# Altium PCB PCB1.PcbDoc (part 1 of 2)
Units mil, origin at the board's own origin, x right, y up, seen from the top; angles counter-clockwise.
Board outline 4250 x 4500 mil, 2 copper layers (Top Layer, Bottom Layer); 112 components, 121 nets, 412 pads, 86 vias.
Unrouted connection lines stored in the file: 20.
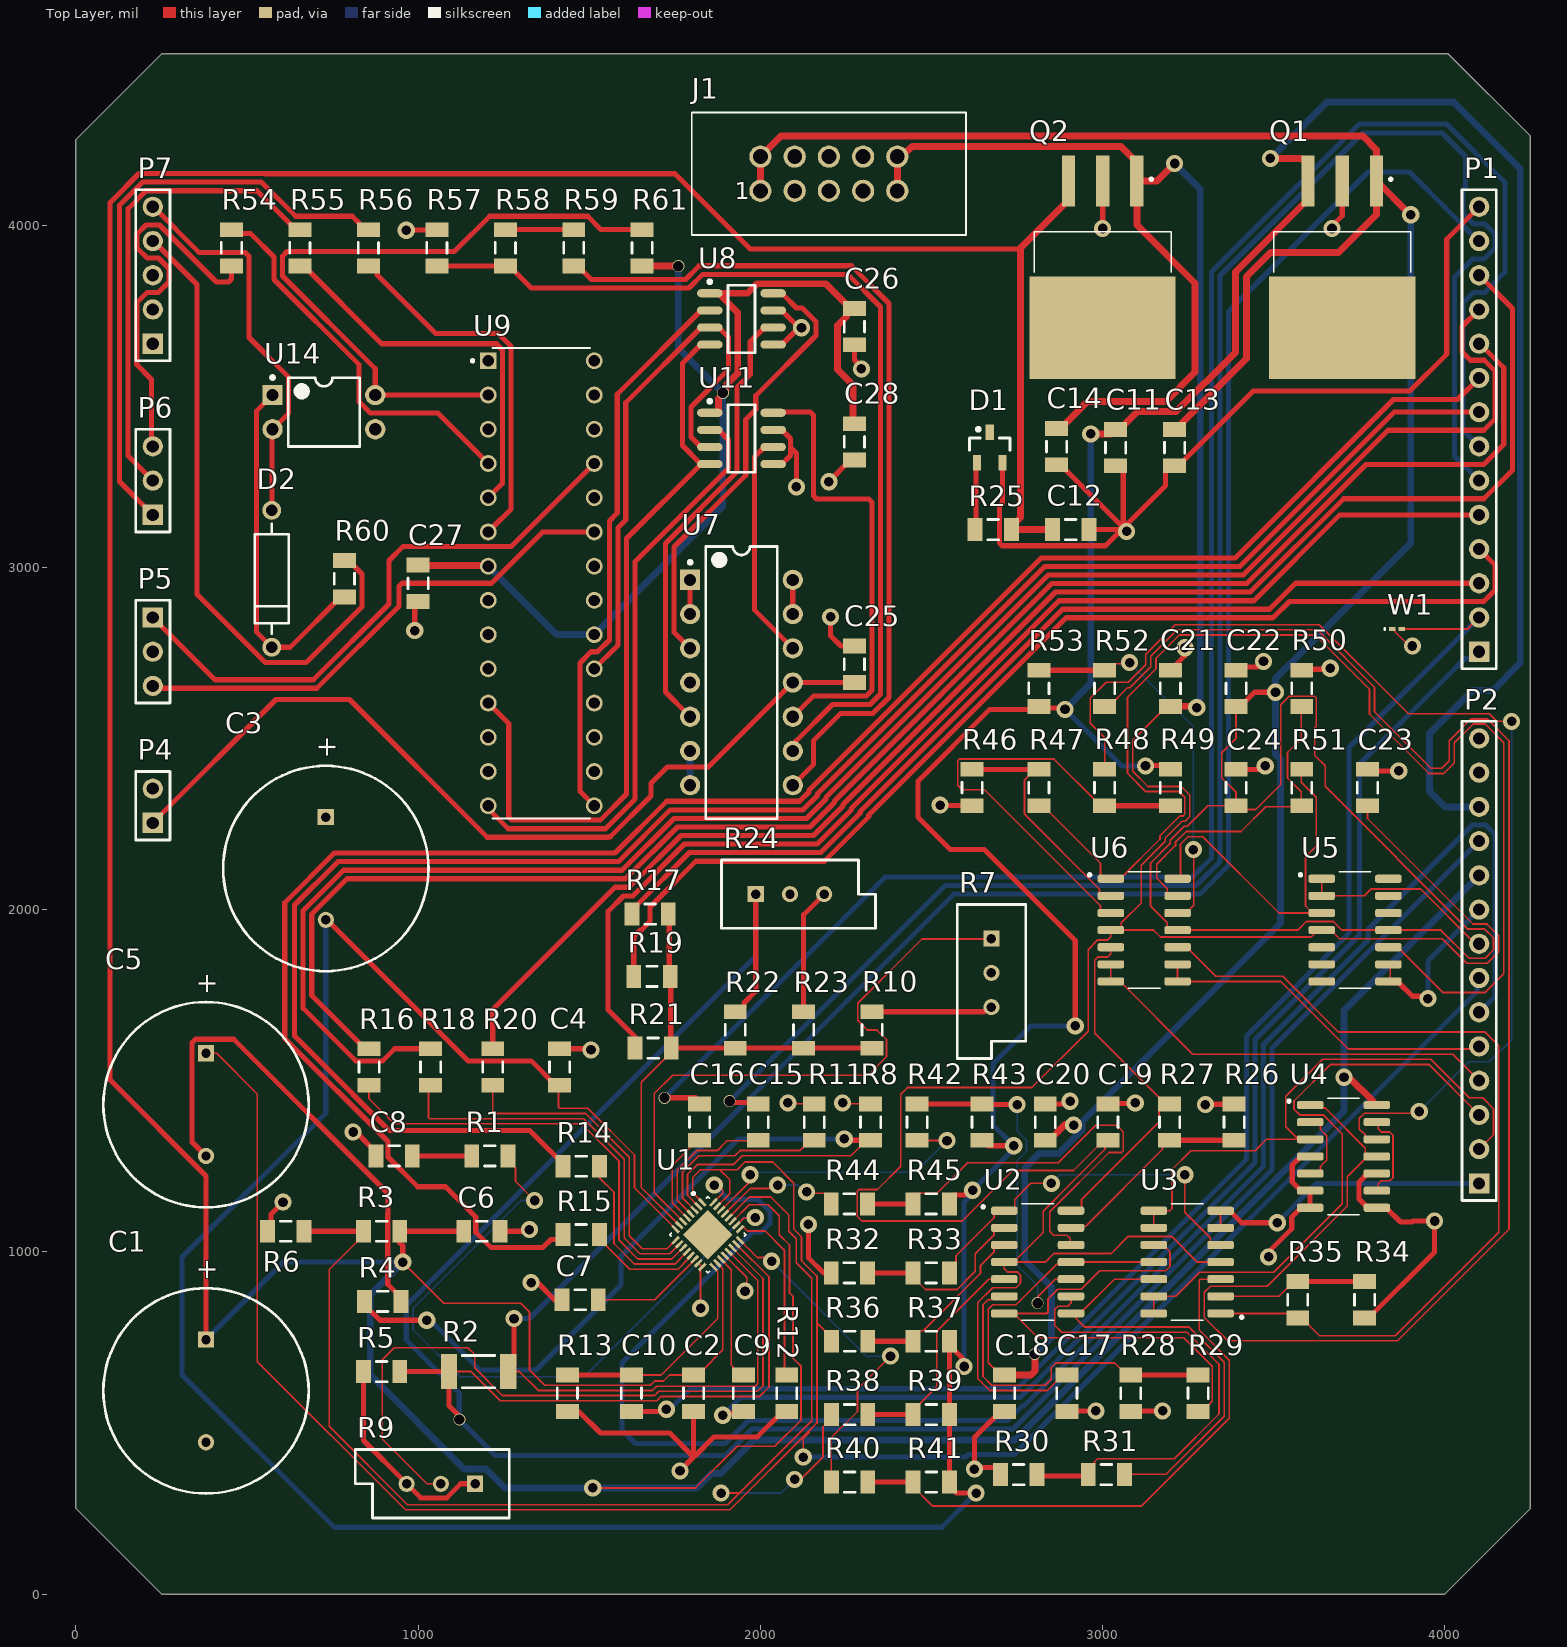
[diagram p0: Top Layer view]
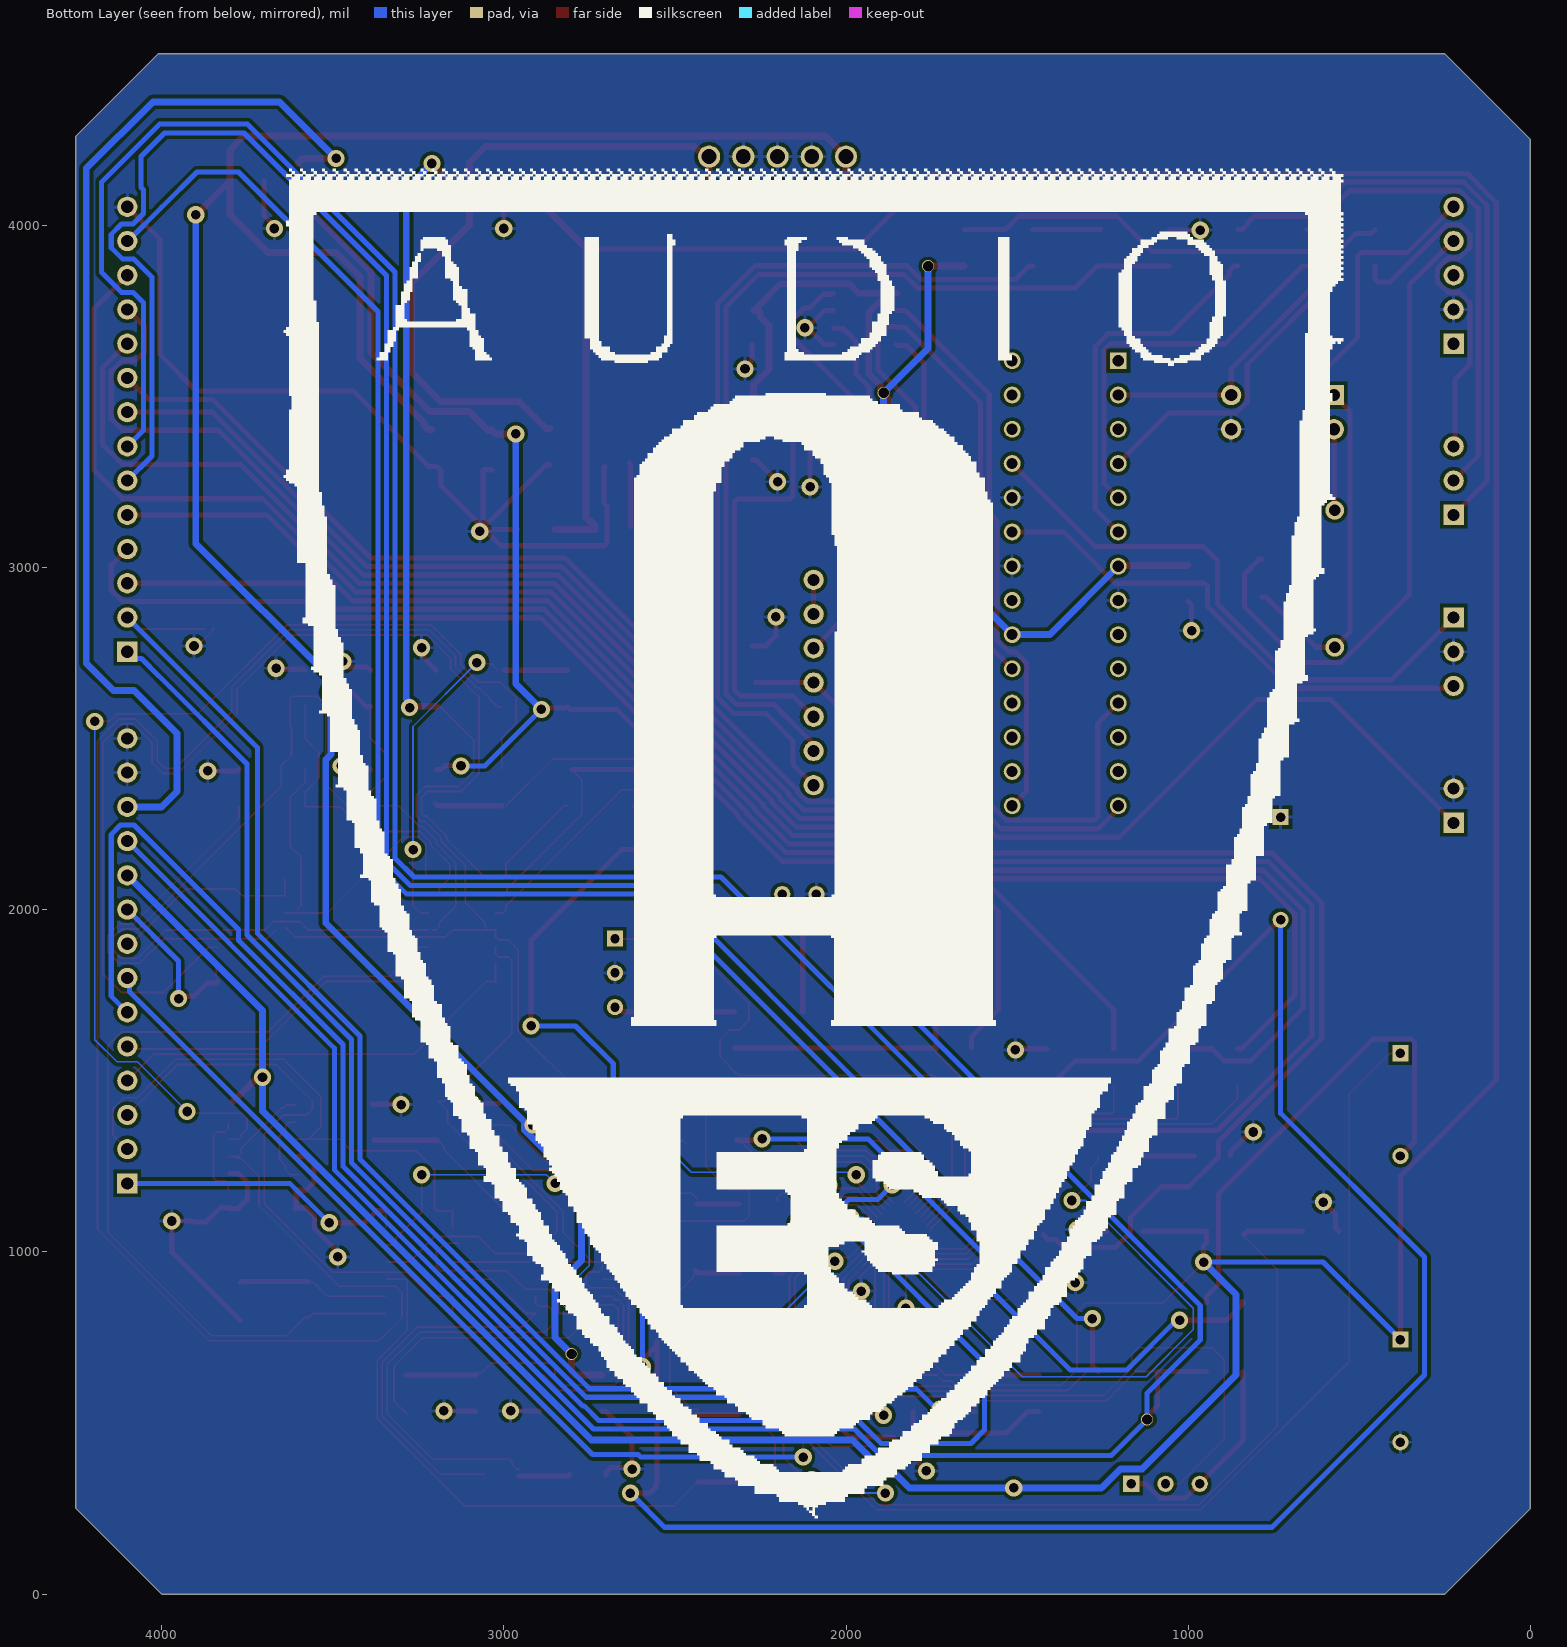
[diagram p1: Bottom Layer view, seen from below]

## Layer stack, top to bottom
Top Solder: solder mask 0.4, Solder Resist, Dk 3.5
Top Layer: signal copper 1.4
Dielectric 1: dielectric 12.6, FR-4, Dk 4.8
Bottom Layer: signal copper 1.4
Bottom Solder: solder mask 0.4, Solder Resist, Dk 3.5

## Board outline
250,0 0,250 0,4250 250,4500 4010,4500 4250,4260 4250,250 4000,0

## Design rules (kind name [scope] priority, off if disabled: settings)
Clearance Clearance_1 [All] p1: gap=10 ignorepadtopadclearanceinfootprint=FALSE except(0: Arc-Hole Track-Hole SMDPad-Hole THPad-Hole Via-Hole Fill-Hole Poly-Hole Region-Hole Text-Hole; 6: Arc-SMDPad Track-SMDPad SMDPad-SMDPad SMDPad-Fill SMDPad-Poly SMDPad-Region)
Clearance [InComponentClass('SSI2130')] p2: gap=10 ignorepadtopadclearanceinfootprint=FALSE except(0: Arc-Hole Track-Hole SMDPad-Hole THPad-Hole Via-Hole Fill-Hole Poly-Hole Region-Hole Text-Hole; 3: Arc-SMDPad Track-SMDPad SMDPad-SMDPad)
MinimumSolderMaskSliver [All] p1: minsoldermaskwidth=6
PolygonConnect [All] p1: connectstyle=Relief reliefconductorwidth=10 reliefentries=4 polygonreliefangle="90 Angle" airgapwidth=10
RoomDefinition buffNlvlshifter [InComponentClass('buffNlvlshifter')] p1: confinementstyle=ConfineIn formatcopy=TRUE lockcomponents=FALSE outline 2169.29,889.21 2169.29,1189.37 2408.12,1189.37 2408.12,1469.8 3433.53,1469.8 3433.53,950.71 3814.82,950.71 3814.82,769.29 3327.95,769.29 3327.95,496.14 3101.53,496.14 3101.53,299.36 2590,299.36 2590,277.9 2408.58,277.9 2169.75,277.9 2169.75,889.21
RoomDefinition SSI2130 [InComponentClass('SSI2130')] p2: confinementstyle=ConfineIn formatcopy=TRUE lockcomponents=FALSE outline 66.06,279.6 66.06,968.95 66.06,1805.42 416.06,1805.42 416.06,2495.42 1043.94,2495.42 1043.94,2158.94 2350.24,2158.94 2350.24,2028.94 2790.24,2028.94 2790.24,1551.06 2371.14,1551.06 2371.14,1288.38 2126.15,1288.38 2126.15,496.14 1854.13,496.14 1485.2,496.14 1280.31,496.14 1280.31,208.25 802.44,208.25 802.44,279.6
RoomDefinition Midi_to_CV [InComponentClass('Midi_to_CV')] p3: confinementstyle=ConfineIn formatcopy=TRUE lockcomponents=FALSE outline 1154.53,2163.38 2104.53,2163.38 2454.53,2683.38 2454.53,3953.38 1804.53,3953.38 1804.53,4223.38 94.53,4223.38 94.53,2163.38 324.53,2163.38 324.53,2263.38 594.53,2533.38 784.53,2533.38
RoomDefinition power [InComponentClass('power')] p4: confinementstyle=ConfineIn formatcopy=TRUE lockcomponents=FALSE outline 1779.37,3951.02 1779.37,4348.98 2620.63,4348.98 2620.63,4223.98 3934.21,4223.98 3934.21,3529.17 3259.37,3529.17 3259.37,3259.29 2997.17,3259.29 2997.17,3060.63 2815.76,3060.63 2589.29,3060.63 2589.29,3261.26 2589.13,3261.26 2589.13,3951.02
RoomDefinition flipflop [InComponentClass('flipflop')] p5: confinementstyle=ConfineIn formatcopy=TRUE lockcomponents=FALSE outline 3526.35,1087.59 3526.35,1469.8 3860.72,1469.8 3860.72,1087.59
RoomDefinition buffNlvlshifter2 [InComponentClass('buffNlvlshifter2')] p6: confinementstyle=ConfineIn formatcopy=TRUE lockcomponents=FALSE outline 2569.09,2265.88 2569.09,2447.3 2764.4,2447.3 2764.4,2736.71 3631.14,2736.71 3631.14,2447.3 3823.14,2447.3 3823.14,2131.1 3894.49,2131.1 3894.49,1748.9 2944.05,1748.9 2944.05,2265.88
RoutingVias [All] p1: holewidth=28 width=50 viastyle="Through Hole" minholewidth=28 minwidth=50 maxholewidth=28 maxwidth=50
SMDEntry [InComponentClass('SSI2130')] p1: side=TRUE corner=TRUE anyangle=TRUE
SMDNeckDown [InComponentClass('SSI2130')] p1: percent=90.000
SilkToSolderMaskClearance [IsPad] p1: minsilkscreentomaskgap=5 clearancetoexposedcopper=TRUE
SolderMaskExpansion [All] p1: expansion=4 istentingtop=FALSE
Width [All] p1: maxlimit=25 minlimit=5 preferedwidth=20 toplayer_maxwidth=20 toplayer_prefwidth=15 minimp=50.000000 maximp=50.000000 favimp=50.000000
28 further rules are at their usual default settings.

## Classes and differential pairs
component class SSI2130: C1 C2 C4 C5 C6 C7 C8 C9 C10 R1 R2 R3 R4 R5 R6 R7 R8 R9 R10 R11 R12 R13 R14 R15 R16 R17 R18 R19 R20 R21 R22 R23 R24 U1
component class power: C11 C12 C13 C14 D1 J1 Q1 Q2 R25
component class Midi_to_CV: C25 C26 C27 C28 D2 P4 P5 P6 P7 R54 R55 R56 R57 R58 R59 R60 R61 U7 U8 U9 U11 U14
component class io: C15 C16 P1 P2 W1
component class flipflop: U4
component class buffNlvlshifter: C17 C18 C19 C20 R26 R27 R28 R29 R30 R31 R32 R33 R34 R35 R36 R37 R38 R39 R40 R41 R42 R43 R44 R45 U2 U3
component class buffNlvlshifter2: C21 C22 C23 C24 R46 R47 R48 R49 R50 R51 R52 R53 U5 U6

## Components (designator, comment, footprint, x,y, rotation, side; value= is the part's Value field where it differs from the comment)
C1 "Cap Pol1" RB7.6-15 380,593.54 r90 top value=10uF
C2 "Cap" C1206 1804.76,586.85 r90 top value=100nF
C3 "Cap Pol1" RB7.6-15 730,2120 r90 top value=10uF
C4 "Cap" C1206 1413.07,1540 r270 top value=100nF
C5 "Cap Pol1" RB7.6-15 380,1430 r90 top value=10uF
C6 "Cap" C1206 1186.3,1060 r180 top value=0.1uF
C7 "Cap" C1206 1473.15,860 r0 top value=3.9nF
C8 "Cap" C1206 929.45,1280 r0 top value=10nF
C9 "Cap" C1206 1950.49,586.85 r270 top value=10nF
C10 "Cap" C1206 1622.69,586.85 r270 top value=10nF
C11 "Cap" C1206 3037.56,3350 r90 top value=0.1uF
C12 "Cap" C1206 2906.47,3110 r180 top value=0.1uF
C13 "Cap" C1206 3210,3350 r90 top value=0.22uF
C14 "Cap" C1206 2865.13,3352.91 r90 top value=0.22uF
C15 "Cap" C1206 1993.55,1379.09 r90 top value=0.1uF
C16 "Cap" C1206 1822.29,1379.09 r90 top value=0.1uF
C17 "Cap" C1206 2895.23,586.85 r90 top value=100nF
C18 "Cap" C1206 2713.24,586.85 r90 top value=100nF
C19 "Cap" C1206 3015.14,1379.09 r270 top value=100nF
C20 "Cap" C1206 2832.08,1379.09 r270 top value=100nF
C21 "Cap" C1206 3197.77,2646 r270 top value=100nF
C22 "Cap" C1206 3389.77,2646 r270 top value=100nF
C23 "Cap" C1206 3773.77,2356.59 r270 top value=100nF
C24 "Cap" C1206 3389.77,2356.59 r270 top value=100nF
C25 "C1206C103JARACTU" C1206 2274.53,2716.8 r270 top value="10,000 pF"
C26 "C1206C103JARACTU" C1206 2274.53,3703.38 r90 top value="10,000 pF"
C27 "C1206C103JARACTU" C1206 1000,2953.15 r90 top value="10,000 pF"
C28 "C1206C103JARACTU" C1206 2274.53,3366.53 r90 top value="10,000 pF"
D1 "D Zener" SOT23_N 2670,3350 r90 top
D2 "Diode" DIODE-0.4 572.13,2966.53 r270 top
J1 "61201021621" 61201021621 2200,4150 r0 top
P1 "Header 14" HDR1X14 4100,2753.38 r90 top
P2 "Header 14" HDR1X14 4100,1200 r90 top
P4 "J3" HDR1X2 224.53,2253.38 r90 top
P5 "NP_SEL" HDR1X3 224.53,2853.38 r270 top
P6 "GTC_OUTL" HDR1X3 224.53,3153.38 r90 top
P7 "MIDIJACK" HDR1X5 224.53,3653.38 r90 top
Q1 "LM7905CT/NOPB" TO254P1524X483-4N 3700,3876.38 r270 top
Q2 "LM7805CT/NOPB" TO254P1524X483-4N 3000,3876.38 r270 top
R1 "Res3" C1206 1209.45,1280 r0 top value=270
R2 "Res3" 12Z-2010 1176.3,650 r180 top value=500K
R3 "Res3" C1206 893.15,1060 r0 top value=20K
R4 "Res3" C1206 896.3,855 r0 top value=4K
R5 "Res3" C1206 893.15,650 r0 top value=4K7
R6 "Res3" C1206 613.15,1060 r0 top value=20K
R7 "RPot" VR5 2675,1815 r270 top value=5K
R8 "Res3" C1206 2321.77,1379.09 r270 top value=4K7
R9 "RPot" VR5 1066.38,322.19 r180 top value=5K
R10 "Res3" C1206 2326.3,1648.15 r90 top value=270K
R11 "Res3" C1206 2157.1,1379.09 r270 top value=4K7
R12 "Res3" C1206 2076.78,586.85 r90 top value=10K
R13 "Res3" C1206 1435.83,586.85 r90 top value=10K
R14 "Res3" C1206 1476.3,1250 r0 top value=100K
R15 "Res3" C1206 1476.3,1050 r0 top value=100K
R16 "Res3" C1206 856.3,1540 r270 top value=100K
R17 "Res3" C1206 1677.56,1986.61 r0 top value=100K
R18 "Res3" C1206 1036.3,1540 r270 top value=100K
R19 "Res3" C1206 1683.15,1805 r0 top value=100K
R20 "Res3" C1206 1217.81,1540 r270 top value=100K
R21 "Res3" C1206 1686.3,1595 r0 top value=100K
R22 "Res3" C1206 1926.3,1648.15 r90 top value=100K
R23 "Res3" C1206 2126.3,1648.15 r90 top value=10K
R24 "RPot" VR5 2086.3,2045 r0 top value=5K
R25 "Res3" C1206 2680,3110 r0 top value=1K8
R26 "Res1" C1206 3384.16,1379.09 r270 top value=2.49k
R27 "Res1" C1206 3195.28,1379.09 r90 top value=10K
R28 "Res1" C1206 3081.99,586.85 r90 top value=2.49K
R29 "Res1" C1206 3278.58,586.85 r270 top value=10K
R30 "Res1" C1206 2754.58,348.73 r0 top value=2.49K
R31 "Res1" C1206 3010.82,348.73 r0 top value=10K
R32 "Res1" C1206 2260,938.58 r0 top value=2.49K
R33 "Res1" C1206 2498.83,938.58 r0 top value=10K
R34 "Res1" C1206 3765.45,860 r90 top value=2.49K
R35 "Res1" C1206 3570,860 r270 top value=10K
R36 "Res1" C1206 2260.46,738.55 r0 top value=2.49K
R37 "Res1" C1206 2499.29,738.55 r180 top value=10K
R38 "Res1" C1206 2260.46,524.54 r0 top value=2.49K
R39 "Res1" C1206 2499.29,524.54 r180 top value=10K
R40 "Res1" C1206 2260.46,327.27 r0 top value=2.49K
R41 "Res1" C1206 2499.29,327.27 r180 top value=10K
R42 "Res1" C1206 2457.49,1379.09 r90 top value=2.49K
R43 "Res1" C1206 2647.52,1379.09 r90 top value=10K
R44 "Res1" C1206 2260,1140 r0 top value=2.49K
R45 "Res1" C1206 2498.83,1140 r180 top value=10K
R46 "Res1" C1206 2618.46,2356.59 r90 top value=2.49k
R47 "Res1" C1206 2813.77,2356.59 r270 top value=4.99K
R48 "Res1" C1206 3005.77,2356.59 r270 top value=2.49K
R49 "Res1" C1206 3197.77,2356.59 r270 top value=4.99K
R50 "Res1" C1206 3581.77,2646 r270 top value=2.49k
R51 "Res1" C1206 3581.77,2356.59 r90 top value=4.99K
R52 "Res1" C1206 3005.77,2646 r90 top value=2.49K
R53 "Res1" C1206 2813.77,2646 r90 top value=4.99K
R54 "RNCP1206FTD4K02" C1206 454.53,3933.38 r90 top
R55 "RNCP1206FTD4K02" C1206 654.53,3933.38 r270 top
R56 "RNCP1206FTD4K02" C1206 854.53,3933.38 r270 top
R57 "RNCP1206FTD4K02" C1206 1054.53,3933.38 r270 top
R58 "RNCP1206FTD4K02" C1206 1254.53,3933.38 r90 top
R59 "RNCP1206FTD4K02" C1206 1454.53,3933.38 r270 top
R60 "RNCP1206FTD4K02" C1206 784.53,2966.53 r270 top
R61 "RNCP1206FTD4K02" C1206 1654.53,3933.38 r270 top
U1 "SSI2130" QFN40P400X400X90-33N 1846.3,1050 r315 top
U2 "TL074CD" SOIC127P600X175-14N 2810,970 r0 top
U3 "TL074CD" SOIC127P600X175-14N 3246.95,970 r180 top
U4 "CD4013BM96" SOIC127P600X175-14N 3703.67,1278.69 r0 top
U5 "TL074CD" SOIC127P600X175-14N 3737.44,1940 r0 top
U6 "TL074CD" SOIC127P600X175-14N 3121.37,1940 r0 top
U7 "LM324N" DIP-14 1944.53,2663.38 r0 top
U8 "MCP4822-E/SN" SO8_L 1944.53,3725.77 r0 top
U9 "ATmega328P-PU" DIP787W46P254L3467H508Q28 1359.53,2953.38 r0 top
U11 "MCP4822-E/SN" SO8_L 1944.53,3376.53 r0 top
U14 "SFH618A-2" DIP-4 724.53,3453.38 r0 top
W1 "Jumper" 0603 3860,2820 r0 top

## Footprints (in the part's own frame and the unit in brackets; to place one, negate y for a bottom-side part, rotate by r counter-clockwise, add the part's x,y. Pads: shape width x height; smd on the part's side, far side on the other; paste and mask are expansions set on the pad)
12Z-2010 [mm] "Chip Resistor, Body 5.0x2.5mm, IPC High Density"
  rect 1.2x2.6 smd: 1(-2.2,0) 2(2.2,0)
  silkscreen extent -1.2,-1.2 1.2,1.2, body extent -2.58,-1.33 2.58,1.33, height 0.9
0603 [mm] "Chip Inductor, Body 0.6x0.3mm, IPC High Density"
  rect 0.5x0.3 smd: 1(-0.35,0) 2(0.35,0)
  silkscreen extent -0.9,-0.05 -0.9,0.05, body extent -0.33,-0.18 0.33,0.18, height 0.55
61201021621 [mm]
  round 1.65 hole 1.1: 1(-5.08,-1.27) 2(-5.08,1.27) 3(-2.54,-1.27) 4(-2.54,1.27) 5(0,-1.27) 6(0,1.27) 7(2.54,-1.27) 8(2.54,1.27) 9(5.08,-1.27) 10(5.08,1.27)
  silkscreen extent -10.18,-4.55 10.18,4.55
C1206 [mm] "Chip Capacitor, Body 3.2x1.6mm, IPC High Density"
  rect 1.1x1.7 smd: 1(-1.35,0) 2(1.35,0)
  silkscreen extent -0.4,-0.75 0.4,0.75, body extent -1.7,-0.9 1.7,0.9, height 1.3
DIODE-0.4 [mm] "Diode, Thru-Hole; 2 Leads; 0.4 in Pin Spacing"
  round 1.4 hole 0.85: 1(-5.08,0) 2(5.08,0)
  silkscreen extent -4.06,-1.27 4.06,1.27
DIP787W46P254L3467H508Q28 [mm]
  rect 1.25x1.25 hole 0.83: 1(-3.937,16.51)
  round 1.25 hole 0.83: 2(-3.937,13.97) 3(-3.937,11.43) 4(-3.937,8.89) 5(-3.937,6.35) 6(-3.937,3.81) 7(-3.937,1.27) 8(-3.937,-1.27) 9(-3.937,-3.81) 10(-3.937,-6.35) 11(-3.937,-8.89) 12(-3.937,-11.43) 13(-3.937,-13.97) 14(-3.937,-16.51) 15(3.937,-16.51) 16(3.937,-13.97) 17(3.937,-11.43) 18(3.937,-8.89) 19(3.937,-6.35) 20(3.937,-3.81) 21(3.937,-1.27) 22(3.937,1.27) 23(3.937,3.81) 24(3.937,6.35) 25(3.937,8.89) 26(3.937,11.43) 27(3.937,13.97) 28(3.937,16.51)
  silkscreen extent -5.2,-17.45 3.62,17.45, body extent -5.08,-17.34 5.08,17.34, height 4.57
DIP-4 [mm] "DIP; 4 Leads; Row Spacing 7.62 mm; Pitch 2.54 mm"
  rect 1.5x1.5 hole 0.9: 1(-3.81,1.27)
  round 1.5 hole 0.9: 2(-3.81,-1.27) 3(3.81,-1.27) 4(3.81,1.27)
  silkscreen extent -3.93,-2.55 2.65,2.69, body extent -3.15,-2.5 3.15,2.5, height 5.6
DIP-14 [mm] "DIP; 14 Leads; Row Spacing 7.62 mm; Pitch 2.54 mm"
  rect 1.5x1.5 hole 0.9: 1(-3.81,7.62)
  round 1.5 hole 0.9: 2(-3.81,5.08) 3(-3.81,2.54) 4(-3.81,0) 5(-3.81,-2.54) 6(-3.81,-5.08) 7(-3.81,-7.62) 8(3.81,-7.62) 9(3.81,-5.08) 10(3.81,-2.54) 11(3.81,0) 12(3.81,2.54) 13(3.81,5.08) 14(3.81,7.62)
  silkscreen extent -3.93,-10.1 2.65,10.1, body extent -3.6,-10.1 3.6,10.1, height 5.08
HDR1X2 [mm] "Connector; Header; 2 Position"
  rect 1.5x1.5 hole 0.9: 1(0,0)
  round 1.5 hole 0.9: 2(2.54,0)
  silkscreen extent -1.27,-1.27 3.81,1.27
HDR1X3 [mm] "Connector; Header; 3 Position"
  rect 1.5x1.5 hole 0.9: 1(0,0)
  round 1.5 hole 0.9: 2(2.54,0) 3(5.08,0)
  silkscreen extent -1.27,-1.27 6.35,1.27
HDR1X5 [mm] "Connector; Header; 5 Position"
  rect 1.5x1.5 hole 0.9: 1(0,0)
  round 1.5 hole 0.9: 2(2.54,0) 3(5.08,0) 4(7.62,0) 5(10.16,0)
  silkscreen extent -1.27,-1.27 11.43,1.27
HDR1X14 [mm] "Connector; Header; 14 Position"
  rect 1.5x1.5 hole 0.9: 1(0,0)
  round 1.5 hole 0.9: 2(2.54,0) 3(5.08,0) 4(7.62,0) 5(10.16,0) 6(12.7,0) 7(15.24,0) 8(17.78,0) 9(20.32,0) 10(22.86,0) 11(25.4,0) 12(27.94,0) 13(30.48,0) 14(33.02,0)
  silkscreen extent -1.27,-1.27 34.29,1.27
QFN40P400X400X90-33N [mm]
  rrect25% 0.73x0.22 smd: 1(-1.99,1.4) 2(-1.99,1) 3(-1.99,0.6) 4(-1.99,0.2) 5(-1.99,-0.2) 6(-1.99,-0.6) 7(-1.99,-1) 8(-1.99,-1.4) 17(1.99,-1.4) 18(1.99,-1) 19(1.99,-0.6) 20(1.99,-0.2) 21(1.99,0.2) 22(1.99,0.6) 23(1.99,1) 24(1.99,1.4)
  rrect25% 0.22x0.73 smd: 9(-1.4,-1.99) 10(-1,-1.99) 11(-0.6,-1.99) 12(-0.2,-1.99) 13(0.2,-1.99) 14(0.6,-1.99) 15(1,-1.99) 16(1.4,-1.99) 25(1.4,1.99) 26(1,1.99) 27(0.6,1.99) 28(0.2,1.99) 29(-0.2,1.99) 30(-0.6,1.99) 31(-1,1.99) 32(-1.4,1.99)
  rect 2.6x2.6 smd paste-0.48: 33(0,0)
  silkscreen extent -3.02,-2 2,2
RB7.6-15 [mm] "Polarized Capacitor (Radial); 2 Leads"
  rect 1.2x1.2 hole 0.7: 1(3.81,0)
  round 1.2 hole 0.7: 2(-3.81,0)
  silkscreen extent -7.62,-7.62 7.62,7.62
SO8_L [mm] "SOIC, 8-Leads, Body 4.9x3.9mm, Pitch 1.27mm, IPC High Density"
  oval 1.9x0.6 smd: 1(-2.35,1.905) 2(-2.35,0.635) 3(-2.35,-0.635) 4(-2.35,-1.905) 5(2.35,-1.905) 6(2.35,-0.635) 7(2.35,0.635) 8(2.35,1.905)
  silkscreen extent -2.47,-2.5 1,2.88, body extent -2,-2.5 2,2.5, height 1.75
SOIC127P600X175-14N [mm]
  rrect50% 1.97x0.6 smd: 1(-2.475,3.81) 2(-2.475,2.54) 3(-2.475,1.27) 4(-2.475,0) 5(-2.475,-1.27) 6(-2.475,-2.54) 7(-2.475,-3.81) 8(2.475,-3.81) 9(2.475,-2.54) 10(2.475,-1.27) 11(2.475,0) 12(2.475,1.27) 13(2.475,2.54) 14(2.475,3.81)
  silkscreen extent -4.15,-4.33 1.17,4.33
SOT23_N [mm] "SOT23, 3-Leads, Body 2.9x1.3mm, Pitch 0.95mm, Lead Span 2.3mm - Reverse Pinning, IPC Medium Density"
  rect 1.15x0.6 smd: 1(1.125,0) 2(-1.125,-0.95) 3(-1.125,0.95)
  silkscreen extent -0.2,-1.5 1.47,1.5, body extent -0.7,-1.5 0.7,1.5, height 1.1
TO254P1524X483-4N [mm]
  rect 3.79x0.99 smd: 1(-6.4,2.54) 2(-6.4,0) 3(-6.4,-2.54)
  rect 7.62x10.84 smd paste-6: 4(4.48,0)
  silkscreen extent -6.64,-5.08 0.36,5.08
VR5 [mm] "Thru-Hole; 3 Leads"
  rect 1.2x1.2 hole 0.7: 1(-2.54,0)
  round 1.2 hole 0.7: 2(0,0) 3(2.54,0)
  silkscreen extent -5.08,-2.54 6.35,2.54

## Part data
C1 C3 C5: "Polarized Capacitor (Radial)", LatestRevisionDate=17-Jul-2002, LatestRevisionNote="Re-released for DXP Platform.", PackageDescription="Polarized Capacitor (Radial); 2 Leads", PackageReference=RB7.6-15, Published=8-Jun-2000, Publisher="Altium Limited"
C2 C4 C6 C7 C8 C9 C10 C11 C12 C13 C14 C15 C16 C17 C18 C19 C20 C21 C22 C23 C24: "Capacitor", LatestRevisionDate=17-Jul-2002, LatestRevisionNote="Re-released for DXP Platform.", PackageDescription="Radial Cap, Thru-Hole; 2 Leads; 0.3 in Pin Spacing", PackageReference=RAD-0.3, Published=8-Jun-2000, Publisher="Altium Limited"
C25 C26 C27 C28: library part b4654b650e69147ec39a6b967a45e02, "CAP CER 10000PF 250V 5% X7R 1206", Capacitance="0.1 uF", Manufacturer=KEMET, Package=C1206C-EB, Temperature="-55°C to +150°C", Temperature Characteristic=X7R, Temperature Coefficient=15%, Temperature Range High=+150°C, Temperature Range Low=-55°C, Tolerance=0.05, Voltage Rating="250 V", Automotive=Yes, Automotive Grade="Grade 0", Category=Cap, ComponentLink2Description=Datasheet, ComponentLink2URL=https://content.kemet.com/datasheets/KEM_C1007_X8R_ULTRA_150C_SMD.pdf, Device Class L1="Passive Components", Device Class L2=Capacitors, Device Class L3="Ceramic Capacitors", Digikey Description="CAP CER 10000PF 250V 5% X7R 1206", Height=0.88mm, Ipc Land Pattern Name=CAPC320160X78, Lead Free=Yes, Manufacturer Part Number=C1206C103JARACTU, Material=Ceramic, Octopart=https://octopart.com/c1206c103jaractu-kemet-17306149, RoHS=TRUE
D1: "Zener Diode", LatestRevisionDate=17-Jul-2002, LatestRevisionNote="Re-released for DXP Platform.", PackageDescription="Diode, Thru-Hole; 2 Leads; 0.7 in Pin Spacing", PackageReference=DIODE-0.7, Published=8-Jun-2000, Publisher="Altium Limited"
D2: "Default Diode", Code_JEDEC=DO-214-AB, LatestRevisionDate=17-Jul-2002, LatestRevisionNote="Re-released for DXP Platform.", PackageDescription="DO-214-AB/SMC; 2 C-Bend Leads; Body 7.9 x 5.9 mm, inc. leads (LxW)", PackageReference=SMC, PackageVersion=Sep-1996, Published=8-Jun-2000, Publisher="Altium Limited"
J1: "Connector Header Through Hole 10 position 0.100 _2.54mm_", Package=None, Availability=Unavailable, MF="Wurth Electronics", MP=61201021621, Price=None, SnapEDA_Link=https://www.snapeda.com/parts/61201021621/Wurth%20Electronics%20Inc./view-part/1156232/?ref=snap
P1 P2: "Header, 14-Pin", LatestRevisionDate=17-Jul-2002, LatestRevisionNote="Re-released for DXP Platform.", Publisher="Altium Limited"
P4: library part "Header 2", "Header, 2-Pin", LatestRevisionDate=17-Jul-2002, LatestRevisionNote="Re-released for DXP Platform.", Publisher="Altium Limited"
P5 P6: library part "Header 3", "Header, 3-Pin", LatestRevisionDate=17-Jul-2002, LatestRevisionNote="Re-released for DXP Platform.", Publisher="Altium Limited"
P7: library part "Header 5", "Header, 5-Pin", LatestRevisionDate=17-Jul-2002, LatestRevisionNote="Re-released for DXP Platform.", Publisher="Altium Limited"
Q1: library part LM7805CT/NOPB, "1.5-A, 30-V, linear voltage regulator 3-TO-220 0 to 125", Package="TO-220-3 Texas Instruments", Availability=Unavailable, MF="Texas Instruments", MP=LM7805CT/NOPB, Price=None, SnapEDA_Link=https://www.snapeda.com/parts/LM7805CT/NOPB/Texas%20Instruments/view-part/6627/?ref=snap, Texas_Instruments-Purchase-URL=https://snapeda.com/shop?store=Texas+Instruments&id=6627
Q2: "1.5-A, 30-V, linear voltage regulator 3-TO-220 0 to 125", Package="TO-220-3 Texas Instruments", Availability=Unavailable, MF="Texas Instruments", MP=LM7805CT/NOPB, Price=None, SnapEDA_Link=https://www.snapeda.com/parts/LM7805CT/NOPB/Texas%20Instruments/view-part/6627/?ref=snap, Texas_Instruments-Purchase-URL=https://snapeda.com/shop?store=Texas+Instruments&id=6627
R1 R2 R3 R4 R5 R6 R8 R10 R11 R12 R13 R14 R15 R16 R17 R18 R19 R20 R21 R22 R23 R25 R26 R27 R28 R29 R30 R31 R32 R33 R34 R35 R36 R37 R38 R39 R40 R41 R42 R43 R44 R45 R46 R47 R48 R49 R50 R51 R52 R53: "Resistor", Published=8-Jun-2000, Publisher="Altium Limited"
  R1 R2 R3 R4 R5 R6 R8 R10 R11 R12 R13 R14 R15 R16 R17 R18 R19 R20 R21 R22 R23 R25: LatestRevisionDate=29-May-2009, LatestRevisionNote="IPC-7351 Footprint Added.", PackageDescription="Chip Resistor", PackageReference=J1-0603
  R26 R27 R28 R29 R30 R31 R32 R33 R34 R35 R36 R37 R38 R39 R40 R41 R42 R43 R44 R45 R46 R47 R48 R49 R50 R51 R52 R53: LatestRevisionDate=17-Jul-2002, LatestRevisionNote="Re-released for DXP Platform.", PackageDescription="Axial Device, Thru-Hole; 2 Leads; 0.3 in Pin Spacing", PackageReference=AXIAL-0.3
R7 R9 R24: "Potentiometer", LatestRevisionDate=17-Jul-2002, LatestRevisionNote="Re-released for DXP Platform.", PackageDescription="Variable Resistor, Thru-Hole; 3 Leads", PackageReference=VR5, Published=8-Jun-2000, Publisher="Altium Limited", Set Position=0.5, Sim Note="Enter the Resistance value and the set point into parameter fields."
R54 R55 R56: library part 1029c3af85768c4190bb7ad29bc67b5, "4.02kΩ ±1% 0.5W 1206 High Power Anti-Sulfur Thin Film Chip Resistor", Case Code (Imperial)=1206, Case Code (Metric)=3216, Max Operating Temperature=155°C, Max Power Dissipation=500mW, Min Operating Temperature=-55°C, Resistance=1K, Resistor Type="Thin Film", Temperature Coefficient=100ppm/°C, Tolerance=1%, Case/Package=1206, Features="Moisture Resistant", Height=0.024inch, Lead Free="Lead Free", Length=0.122inch, Mount="Surface Mount", Number of Terminations=2, Packaging="Cut Tape", RoHS Compliant=Yes, Series=RNCP, Width=0.059inch
R57: library part 1029c3af85768c4190bb7ad29bc67b5, "4.02kΩ ±1% 0.5W 1206 High Power Anti-Sulfur Thin Film Chip Resistor", Case Code (Imperial)=1206, Case Code (Metric)=3216, Max Operating Temperature=155°C, Max Power Dissipation=500mW, Min Operating Temperature=-55°C, Resistance=10K, Resistor Type="Thin Film", Temperature Coefficient=100ppm/°C, Tolerance=1%, Case/Package=1206, Features="Moisture Resistant", Height=0.024inch, Lead Free="Lead Free", Length=0.122inch, Mount="Surface Mount", Number of Terminations=2, Packaging="Cut Tape", RoHS Compliant=Yes, Series=RNCP, Width=0.059inch
R58: library part 1029c3af85768c4190bb7ad29bc67b5, "4.02kΩ ±1% 0.5W 1206 High Power Anti-Sulfur Thin Film Chip Resistor", Case Code (Imperial)=1206, Case Code (Metric)=3216, Max Operating Temperature=155°C, Max Power Dissipation=500mW, Min Operating Temperature=-55°C, Resistance=3K, Resistor Type="Thin Film", Temperature Coefficient=100ppm/°C, Tolerance=1%, Case/Package=1206, Features="Moisture Resistant", Height=0.024inch, Lead Free="Lead Free", Length=0.122inch, Mount="Surface Mount", Number of Terminations=2, Packaging="Cut Tape", RoHS Compliant=Yes, Series=RNCP, Width=0.059inch
R59: library part 1029c3af85768c4190bb7ad29bc67b5, "4.02kΩ ±1% 0.5W 1206 High Power Anti-Sulfur Thin Film Chip Resistor", Case Code (Imperial)=1206, Case Code (Metric)=3216, Max Operating Temperature=155°C, Max Power Dissipation=500mW, Min Operating Temperature=-55°C, Resistance=4.7k, Resistor Type="Thin Film", Temperature Coefficient=100ppm/°C, Tolerance=1%, Case/Package=1206, Features="Moisture Resistant", Height=0.024inch, Lead Free="Lead Free", Length=0.122inch, Mount="Surface Mount", Number of Terminations=2, Packaging="Cut Tape", RoHS Compliant=Yes, Series=RNCP, Width=0.059inch
R60: library part 1029c3af85768c4190bb7ad29bc67b5, "4.02kΩ ±1% 0.5W 1206 High Power Anti-Sulfur Thin Film Chip Resistor", Case Code (Imperial)=1206, Case Code (Metric)=3216, Max Operating Temperature=155°C, Max Power Dissipation=500mW, Min Operating Temperature=-55°C, Resistance=220, Resistor Type="Thin Film", Temperature Coefficient=100ppm/°C, Tolerance=1%, Case/Package=1206, Features="Moisture Resistant", Height=0.024inch, Lead Free="Lead Free", Length=0.122inch, Mount="Surface Mount", Number of Terminations=2, Packaging="Cut Tape", RoHS Compliant=Yes, Series=RNCP, Width=0.059inch
R61: library part 1029c3af85768c4190bb7ad29bc67b5, "4.02kΩ ±1% 0.5W 1206 High Power Anti-Sulfur Thin Film Chip Resistor", Case Code (Imperial)=1206, Case Code (Metric)=3216, Max Operating Temperature=155°C, Max Power Dissipation=500mW, Min Operating Temperature=-55°C, Resistance=500, Resistor Type="Thin Film", Temperature Coefficient=100ppm/°C, Tolerance=1%, Case/Package=1206, Features="Moisture Resistant", Height=0.024inch, Lead Free="Lead Free", Length=0.122inch, Mount="Surface Mount", Number of Terminations=2, Packaging="Cut Tape", RoHS Compliant=Yes, Series=RNCP, Width=0.059inch
U1: "Voltage controlled oscillator subsystem for high-performance electronic musical instruments", Package=Package, Availability=Unavailable, Check_prices=https://www.snapeda.com/parts/SSI2130/Sound%20Semiconductor/view-part/5718733/?ref=eda, MF="Sound Semiconductor", MP=SSI2130, Price=None, SnapEDA_Link=https://www.snapeda.com/parts/SSI2130/Sound%20Semiconductor/view-part/5718733/?ref=snap
U2 U3 U5 U6: "Quad Low-Noise JFET-Input General-Purpose Operational Amplifier 14-SOIC 0 to 70", Package="SOIC-14 Texas Instruments", Availability=Good, BuyPart=https://www.snapeda.com/parts/TL074CD/Texas%20Instruments/view-part/4793449/?ref=eda, DigiKey-Purchase-URL=https://snapeda.com/shop?store=DigiKey&id=4793449, MF="Texas Instruments", Mouser-Purchase-URL=https://snapeda.com/shop?store=Mouser&id=4793449, MP=TL074CD, Price=None, SnapEDA_Link=https://www.snapeda.com/parts/TL074CD/Texas%20Instruments/view-part/4793449/?ref=snap, Texas_Instruments-Purchase-URL=https://snapeda.com/shop?store=Texas+Instruments&id=4793449
U4 U14: Package=None, Availability=Unavailable, Price=None
  U4: MP=CD4013BM96
  U14: MP=SFH618A-2
U7: library part AMP-OPA-LM124-14, "Low Power Quad Operational Amplifier, 14-pin MDIP", Manufacturer="Texas Instruments", Package Reference=N0014A, PackageTopMarking=NSUZXYYTTE#*LM324N, PowerWise=N, Code_JEDEC=MS-001-AA, ComponentLink1Description="Datasheet URL", ComponentLink1URL=http://www.ti.com/general/docs/lit/getliterature.tsp?genericPartNumber=LM324&fileType=pdf, CompType=Amplifiers, PackageDescription="MDIP, .750 x .250 x.130in, 14 Lead, .100in Pitch", PinCount=14, RoHS=N
U8 U11: library part CON-DAC-MCP4822-8, "12-Bit DACs with Internal VREF and SPI Interface, 8-Pin SOIC 150mil, Extended Temperature", Code_IPC=SOIC127P600-8, Code_JEDEC=MS-012, ComponentLink1Description="Manufacturer URL", ComponentLink1URL=http://www.microchip.com/, ComponentLink2Description=Datasheet, ComponentLink2URL=http://ww1.microchip.com/downloads/en/DeviceDoc/22249A.pdf, ComponentLink3Description="Package Specification", ComponentLink3URL=http://www.microchip.com/stellent/groups/techpub_sg/documents/packagingspec/en012702.pdf, DatasheetVersion="revA, Apr-2010", PackageDescription="8-Lead Plastic Small Outline (SN) - Narrow, 3.90mm Body [SOIC]", PackageReference=SOIC-SN8, PackageVersion="revBB, Aug-2009", RevisionNote="URLs added. DatasheetVersion updated. Sch updated."
U9: library part MC-8B-ATM48-IL28, "8-bit AVR Microcontroller, 32KB Flash, 1KB EEPROM, 2KB SRAM, 28-pin PDIP, Industrial Grade (-40°C to 85°C)", ComponentLink1Description="Manufacturer URL", ComponentLink1URL=http://www.atmel.com/, ComponentLink2Description="ATmega48A/48PA/88A/88PA/168A/168PA/328/328P Datasheet", ComponentLink2URL=http://www.atmel.com/dyn/resources/prod_documents/8271.pdf, ComponentLink3Description="ATmega48A/48PA/88A/88PA/168A/168PA/328/328P Summary", ComponentLink3URL=http://www.atmel.com/dyn/resources/prod_documents/8271S.pdf, DatasheetVersion="revD, May-2011", PackageDescription="28-lead (0.300\"/7.62mm Wide) Plastic Dual Inline Package (PDIP)", PackageReference=28P3, PackageVersion="revB, Sep-2001", RevisionNote="DatasheetVersion updated. URLs added."
W1: "Jumper Wire", LatestRevisionDate=17-Jul-2002, LatestRevisionNote="Re-released for DXP Platform.", PackageDescription="Radial Cap, Thru-Hole; 2 Leads; 0.2 in Pin Spacing", PackageReference=RAD-0.2, Published=24-Mar-1999, Publisher="Altium Limited"

## Via types
v1: diameter 50, hole 28, Top Layer to Bottom Layer, 79 vias
v2: diameter 35, hole 30, Top Layer to Bottom Layer, 7 vias

## Nets (pads, with @x,y where several pads share a name; then routed paths per layer and width w, separated by ;. In a path a pad name is that pad's centre, name@x,y a point inside that pad or via, vN(x,y) a via of type N, cw(c..) or ccw(c..) an arc to the next point about the centre after c; other vN are vias at no path point)
5V: C26.2 C27.2 C28.2 R61.2 U8.1 U9.7 U9.20 U11.1 | length 3202.7
  Top Layer w20: C27.2@1000,3006.3 1001.46,3004.84 1194.84,3004.84 U9.7@1200,3010 ; R61.2@1654.53,3880.23 1654.65,3880.12 1759.88,3880.12 v2(1760,3880) ; U11.1@1852.01,3451.53 1875.73,3451.53 1877.4,3453.2 1877.4,3493.34 ; U8.1@1852.01,3800.77 U8.1@1877.6,3800.77 ; v2@1900,3520 1900,3532.14 1933.65,3565.79 1933.65,3744.72 U8.1@1877.6,3800.77 ; C28.2@2270,3420 2270,3532.46 2225.06,3577.39 2225.06,3707.07 2251.06,3733.07 2251.06,3744.88 C26.2@2262.72,3756.53 ; C26.2@2270,3750 2269.25,3750 C26.2@2262.72,3756.53 ; U8.1@1877.6,3800.77 1962.81,3800.77 1990.62,3828.58 2190.67,3828.58 C26.2@2262.72,3756.53
  Bottom Layer w20: U9.7@1204.53,3003.38 1404.53,2803.38 U9.20@1514.53,2803.38 1516.62,2803.38 U9.20@1520,2800 ; U9.20@1520,2810 1521.15,2810 1890,3178.85 v2(1890,3510) 1760,3640 v2(1760,3880)
A0: P5.3 U9.23 | length 1516.2
  Top Layer w15: P5.3@224.53,2653.38 231.44,2646.47 703.55,2646.47 943.56,2886.48 943.56,2944.59 952.35,2953.38 1214.08,2953.38 1364.08,3103.38 U9.23@1514.53,3103.38
A2: P5.1 U9.25 | length 1701.3
  Top Layer w15: P5.1@224.53,2853.38 406.44,2671.47 693.2,2671.47 914.53,2892.8 914.53,3019.55 956.26,3061.27 1272.42,3061.27 U9.25@1514.53,3303.38
A3: U9.26
A4: U9.27
A5: U9.28
A6: U9.1
AREF: U9.21
B0: U9.14 U11.2 | length 1725.9
  Top Layer w15: U9.14@1204.53,2303.38 1204.53,2294.71 1262.96,2236.27 1547.42,2236.27 1633.72,2322.57 1633.72,3016.2 1906.91,3289.39 1906.91,3372.22 1875.75,3403.38 U11.2@1854.53,3403.38
B1: U8.2 U9.15 | length 1648.2
  Top Layer w15: U9.15@1514.53,2303.38 1472.42,2345.49 1472.42,2485.94 1472.42,2547.06 1472.42,2720.82 1504.98,2753.38 1524.08,2753.38 1558.72,2788.03 1558.72,3135.55 1581.64,3158.46 1581.64,3505.99 1826.42,3750.77 U8.2@1852.01,3750.77
B2: U9.16
B3: U9.17
B4: U9.18
B5: U8.3 U9.19 U11.3 | length 1620.3
  Top Layer w15: U9.19@1514.53,2703.38 1583.72,2772.57 1583.72,3115.32 1606.64,3138.24 1606.64,3480.99 1826.42,3700.77 U8.3@1852.01,3700.77 ; U11.3@1852.01,3351.53 1826.42,3351.53 1797.11,3380.84 1797.11,3468.14 1906.15,3577.18 1906.15,3672.22 1874.99,3703.38 U8.3@1854.53,3703.38
B6: U9.9
B7: U9.10
CLOCK: P6.1 R56.1 | length 1759.7
  Top Layer w15: P6.1@224.53,3153.38 127.5,3250.41 127.5,4058.22 194.69,4125.41 542.5,4125.41 642.23,4025.68 807.47,4025.68 828.56,4004.59 828.56,4000.68 842.72,3986.53 R56.1@854.53,3986.53
CONTROL: U7.6 U7.7 | length 102.3
  Bottom Layer w20: U7.7@1785,2365 1794.53,2374.53 U7.6@1794.53,2463.38
D1: U9.3
D2: R54.2 U9.4 | length 1134.9
  Top Layer w15: R54.2@454.53,3986.53 466.22,3974.84 510.49,3974.84 578.56,3906.77 578.56,3840.97 827.5,3592.04 827.5,3483.9 860.99,3450.41 1057.5,3450.41 U9.4@1204.53,3303.38
D3: R55.2 U9.5 | length 1138.7
  Top Layer w15: R55.2@654.53,3880.23 666.34,3880.23 893.19,3653.38 1228.49,3653.38 1246.64,3635.24 1246.64,3245.49 1214.53,3213.38 U9.5@1214.53,3203.38
D4: R56.2 U9.6 | length 1087.1
  Top Layer w15: R56.2@854.53,3880.23 866.34,3880.23 880.49,3866.08 880.49,3854.27 1051.38,3683.38 1233.85,3683.38 1271.64,3645.59 1271.64,3170.49 1214.53,3113.38 U9.6@1204.53,3113.38
D5: U8.4 U9.11 U11.4 | length 2211.3
  Top Layer w15: U9.11@1204.53,2603.38 1264.53,2543.38 1264.53,2270.06 1273.32,2261.27 1531.97,2261.27 1608.72,2338.03 1608.72,3083.83 U11.4@1829.24,3304.35 ; U11.4@1823.6,3304.35 1772.11,3355.84 1772.11,3596.46 1823.6,3647.95 1849.19,3647.95 U8.4@1852.01,3650.77
D6: U9.12
D7: U9.13
GATE: P6.3 R54.1 | length 1154.9
  Top Layer w15: P6.3@224.53,3353.38 220.98,3356.93 220.98,3549.12 177.5,3592.6 177.5,3772.86 208.02,3803.38 241.04,3803.38 271.56,3833.9 271.56,3872.86 241.04,3903.38 208.02,3903.38 177.5,3933.9 177.5,3972.86 205.05,4000.41 244.01,4000.41 411.04,3833.38 445.74,3833.38 454.53,3842.17 R54.1@454.53,3880.23
GND: C1.2 C2.1 C3.1 C4.1 C6.1 C7.1 C8.1 C11.1 C12.1 C13.1 C14.1 C17.1 C18.1 C19.1 C20.1 C21.1 C22.1 C23.1 C24.1 C25.1 C26.1 C27.1 C28.1 D1.2 J1.3 J1.4 J1.5 J1.6 J1.7 J1.8 P1.14 P2.13 P2.14 P4.2 P5.2 P7.2 Q1.2 Q2.2 R6.1 R7.2 R8.1 R11.1 R12.1 R13.1 R24.2 R26.1 R28.1 R30.1 R32.1 R34.1 R46.1 R50.1 R57.1 U1.15 U1.16 U1.20 U4.4 U4.6 U4.7 U4.8 U4.10 U7.4 U8.5 U8.7 U9.8 U9.22 U9.24 U11.5 U11.7 U14.3 W1.1 | length 8677.8
  Top Layer w5: U1.15@1817.89,965.47 1820.03,965.47 U1.16@1829.87,955.63 1822.78,948.53 1822.78,945.94 1825,943.71 v1(1825,835) ; U1.20@1896.13,989.03 1960,925.16 1960,890 v1(1955,885) ; v1(2080,1435) 2082.76,1432.24 R11.1@2157.1,1432.24 ; v1(2240,1435) 2242.76,1432.24 R8.1@2321.77,1432.24 ; W1.1@3846.22,2820 3850.16,2820 3853.56,2816.59 3853.56,2812.45 3896.01,2770 v1(3905,2770)
  Top Layer w15: R6.1@560,1060 570,1070 570,1110 v1(605,1145) ; v1(810,1350) 818.11,1350 876.3,1291.81 C8.1@876.3,1280 ; v1(965,3985) 965.77,3985.77 1053.76,3985.77 R57.1@1054.53,3986.53 ; v1(990,2815) 990,2890 C27.1@1000,2900 ; C6.1@1239.45,1060 1320,1060 v1(1325,1065) ; v1(1330,910) 1348.35,910 1398.35,860 C7.1@1420,860 ; C4.1@1413.07,1593.15 1501.85,1593.15 v1(1505,1590) ; R13.1@1435.83,533.7 1469.3,533.7 1532.8,470.2 1734.8,470.2 1800,405 ; v1(1765,360) 1765,360.48 1804.76,400.24 C2.1@1804.76,533.7 ; 1809.88,404.88 1864.37,459.37 1990.64,459.37 2064.97,533.7 R12.1@2076.78,533.7 ; U11.5@2035,3300 2061.11,3300 2087.95,3326.84 2087.95,3350 ; U11.7@2037.05,3401.53 2062.64,3401.53 2087.95,3376.22 2087.95,3350 ; U8.5@2037.05,3650.77 2062.96,3650.77 2107.18,3695 v1@2115,3695 ; U8.7@2037.05,3750.77 2062.18,3750.77 2112.95,3700 v1(2120,3700) ; v1(2105,3235) 2105,3332.95 2087.95,3350 ; v1(2140,1080) 2140,982.5 2183.92,938.58 R32.1@2206.85,938.58 ; v1(2200,3250) 2200,3250.66 2262.72,3313.38 C28.1@2274.53,3313.38 ; v1(2205,2855) 2205,2800 2235.05,2769.95 C25.1@2274.53,2769.95 ; C26.1@2274.53,3650.23 2274.53,3606.08 2295,3585.61 v1(2295,3580) ; v1(2525,2305) 2525.78,2304.22 2617.68,2304.22 R46.1@2618.46,2303.44 ; v1(2625,365) 2625,457.27 2701.43,533.7 C18.1@2713.24,533.7 ; v1@2630,370 2687.28,370 2701.43,355.85 R30.1@2701.43,348.73 ; D1.2@2705,3295 2707.4,3292.6 2707.4,3187.62 2698,3178.21 2698,3070.94 2705.9,3063.04 3008.04,3063.04 3055,3110 C12.1@2959.62,3110 ; C20.1@2832.08,1432.24 2897.24,1432.24 v1(2905,1440) ; C14.1@2865.13,3299.76 2876.94,3299.76 3055,3121.7 3055,3115 v1@3060,3115 ; C17.1@2895.23,533.7 2895.88,534.35 2979.35,534.35 v1(2980,535) ; v1(3000,3990) Q2.2@3000,4128.35 ; C19.1@3015.14,1432.24 3016.52,1433.62 3093.62,1433.62 v1(3095,1435) ; C11.1@3035,3285 3057.7,3285 3060,3282.7 v1@3060,3115 ; v1(3070,3105) v1@3060,3115 ; R28.1@3081.99,533.7 3082.64,534.35 3174.35,534.35 v1(3175,535) ; C21.1@3197.77,2699.15 3240,2741.38 v1(3240,2765) ; C13.1@3220,3295 3196.34,3295 3184.04,3282.7 3184.04,3239.04 v1@3060,3115 ; C13.1@3220,3295.04 3439.96,3515 3897.48,3515 4005.27,3622.8 4005.27,3958.66 P1.14@4100,4053.38 ; v1(3300,1430) 3301.12,1431.12 3383.04,1431.12 R26.1@3384.16,1432.24 ; C24.1@3389.77,2409.74 3455.27,2409.74 3465.53,2420 v1(3475,2420) ; C22.1@3389.77,2699.15 3398.92,2708.3 3453.3,2708.3 v1(3470,2725) ; v1(3485,985) 3485,999.9 3552.5,1067.4 3552.5,1101.93 3579.26,1128.69 U4.7@3606.23,1128.69 ; R50.1@3581.77,2699.15 3584.69,2702.08 3662.08,2702.08 v1(3665,2705) ; U4.6@3606.23,1178.69 3606.23,1128.77 U4.7@3610,1125 ; U4.4@3606.23,1278.69 3579.26,1278.69 3553.95,1253.38 3553.95,1204 3577.95,1180 U4.6@3610,1180 ; v1(3670,3990) 3670,3997.18 3700,4027.18 Q1.2@3700,4128.35 ; R34.1@3770.41,800 3970,999.59 v1(3970,1090) 3906.61,1090 3903.3,1086.7 3870.08,1086.7 3828.08,1128.69 U4.8@3801.11,1128.69 ; C23.1@3773.77,2409.74 3778.51,2405 v1(3865,2405) ; U4.8@3800,1125 3777.84,1125 3748.83,1154 3748.83,1203.38 3774.14,1228.69 U4.10@3801.11,1228.69
NetC1_1: C1.1 C2.2 C6.2 C12.2 P2.10 Q2.3 R3.2 R25.2 U1.18 U1.27 U4.14 | length 16234.5
  Top Layer w5: v1(955,970) 1075,850 1300,850 1325,825 1325,655 1370.15,609.85 1678.17,609.85 1690.83,622.5 1716.64,622.5 1734.14,640 C2.2@1804.76,640 ; v1(1510,310) 1810,310 1931.76,431.76 2041.99,431.76 2118.75,508.53 2118.75,665.18 2095,688.92 2095,870 2085.06,879.94 2085.06,1019.94 2055,1050 2055,1105 2022.5,1137.5 1967.21,1137.5 U1.27@1918.4,1088.7 ; C2.2@1820,650 1826.57,650 1890,713.43 1890,950.62 U1.18@1873.86,966.76
  Top Layer w15: C1.1@380,743.54 380,1221.84 100,1501.84 100,4066.07 184.34,4150.41 552.86,4150.41 553.27,4150 1750,4150 1970,3930 2760,3930 ; v1(955,970) 955,1017.83 946.3,1026.54 R3.2@946.3,1060 C6.2@1133.15,1060 ; 2796.77,3970 Q2.3@2888.01,4061.24
  Top Layer w20: C12.2@2850,3110 R25.2@2733.15,3110 2733.15,3121.81 2744.8,3133.46 2748.28,3133.46 2760,3145.18 2760,3933.23 2790.89,3964.11 2888.01,4061.24 2900,4073.23 Q2.3@2900,4128.35 ; v1(3705,1510) 3720,1510 U4.14@3790,1440
  Bottom Layer w15: C1.1@380,743.54 606.46,970 v1(955,970)
  Bottom Layer w20: v1(955,970) 860,875 860,640.28 1134.47,365.81 1198.28,365.81 1254.09,310 v1(1510,310) 1815,310 1857.5,352.5 1884.02,352.5 1981.52,450 2744.25,450 3705,1410.75 v1(3705,1510) 3705,1705 P2.10@4100,2100
NetC3_2: C3.2 C4.2 C11.2 P2.12 Q1.3 R37.1 R39.1 R41.1 R43.1 R45.1 R49.1 R53.1 U1.8 | length 14512.2
  Top Layer w5: C4.2@1413.07,1486.85 1410,1483.78 1410,1422.02 1412.93,1419.09 1495.65,1419.09 1632.01,1282.73 1632.01,1186.77 1751.93,1066.86 U1.8@1751.93,1066.43
  Top Layer w15: C3.2@730,1970 733.66,1970 1145.66,1558 1330.11,1558 1401.26,1486.85 C4.2@1413.07,1486.85 ; R41.1@2552.44,327.27 R39.1@2552.44,524.54 R37.1@2552.44,726.74 ; R37.1@2552.44,738.55 R37.1@2552.44,732.44 ; R41.1@2555,320 2555,312.9 2572.9,295 v1(2630,295) ; R37.1@2555,735 R37.1@2552.44,732.44 ; R45.1@2560,1140 2560,1159.83 2566.13,1165.96 2596.49,1165.96 2610.53,1180 v1(2620,1180) ; v1(2595,665) 2588.3,671.7 2588.3,690.88 R37.1@2552.44,726.74 ; R43.1@2650,1325 2665,1310 v1(2740,1310) ; v1(2890,2585) 2886.07,2588.93 2817.7,2588.93 R53.1@2813.77,2592.86 2805.92,2585 2670,2585 2460,2375 2460,2270 2555,2175 2655,2175 2920,1910 v1(2920,1660) ; v1(3125,2420) 3125.84,2420.84 3171.81,2420.84 3182.91,2409.74 R49.1@3197.77,2409.74 ; R37.1@2552.44,726.74 R37.1@2552.44,732.44
  Top Layer w20: v1(2965,3390) 3024.41,3390 C11.2@3034.41,3400 ; C11.2@3037.56,3403.15 C11.2@3034.41,3400 ; v1(3490,4195) 3577.5,4195 3579.55,4192.95 3590.51,4192.95 3600,4183.46 Q1.3@3600,4180 ; Q1.3@3600,4128.35 3600,4073.23 3590.51,4063.74 3588.74,4063.74 3387.57,3862.57 3387.57,3627.57 3214.81,3454.81 3101.04,3454.81 3046.22,3400 C11.2@3034.41,3400
  Bottom Layer w15: C3.2@730,1970 730,1405 310,985 310,640 755,195 2530,195 v1(2630,295) ; v1(2595,665) 2595,1145.53 2620,1170.53 v1(2620,1180) 2740,1300 v1(2740,1310) ; v1@2740,1315 2735,1315 2680,1370 2680,1550 2790,1660 v1(2920,1660) ; v1(2890,2585) 3055,2420 v1(3125,2420)
  Bottom Layer w20: v1(2890,2585) 2965,2660 v1(2965,3390) ; v1(3490,4195) 3655,4360 4025,4360 4220,4165 4220,2720 4140,2640 4080,2640 3955,2515 3955,2345 4000,2300 P2.12@4100,2300
NetC5_1: C5.1 P2.7 R36.1 U1.1 U1.31 | length 6918.1
  Top Layer w5: C5.1@380,1580 411.12,1580 529.85,1461.28 529.85,678.94 962.72,246.07 1911.07,246.07 2142.5,477.5 ; U1.1@1829.87,1144.37 1802.01,1172.23 1802.01,1217.01 1824.87,1239.87 1881.34,1239.87 ; U1.31@1873.86,1133.24 1873.86,1133.86 1910,1170 1910,1211.21 1881.34,1239.87 ; v1(2125,400) 2125,455 2142.5,472.5 2142.5,477.5 ; R36.1@2207.31,738.55 2207.31,750.36 2165,792.67 ; 1881.34,1239.87 1931.84,1239.87 1954.47,1262.5 2035.53,1262.5 2097.5,1200.53 2097.5,1066.75 2120,1044.25 2120,974.22 2165,929.22 2165,792.67 ; 2142.5,477.5 2165,500 2165,792.67
  Bottom Layer w15: v1(2125,400) 2599.9,400 2607.4,407.5 2740.99,407.5 4093.21,1759.72 4093.21,1793.21 P2.7@4100,1800
NetC5_2: C5.2 R4.2 | length 1446.6
  Top Layer w15: C5.2@380,1280 338.88,1321.12 338.88,1610.87 349.13,1621.12 460.97,1621.12 911.45,1170.64 911.45,1112.24 911.15,1111.93 911.15,905.11 946.3,869.96 R4.2@946.3,850
NetC7_2: C7.2 U1.14 | length 331
  Top Layer w5: C7.2@1526.3,860 1691.21,860 1807.6,976.39 U1.14@1807.6,977.9
NetC8_2: C8.2 R1.1 | length 173.7
  Top Layer w15: C8.2@982.6,1280 R1.1@1156.3,1280
NetC9_1: C9.1 U1.19 | length 368.7
  Top Layer w5: U1.19@1885,977.9 1915,947.89 1915,669.15 1944.15,640 C9.1@1950.49,640